# EAGLE board WiderBreadBoard (EAGLE 7.3.0), part 1 of 2
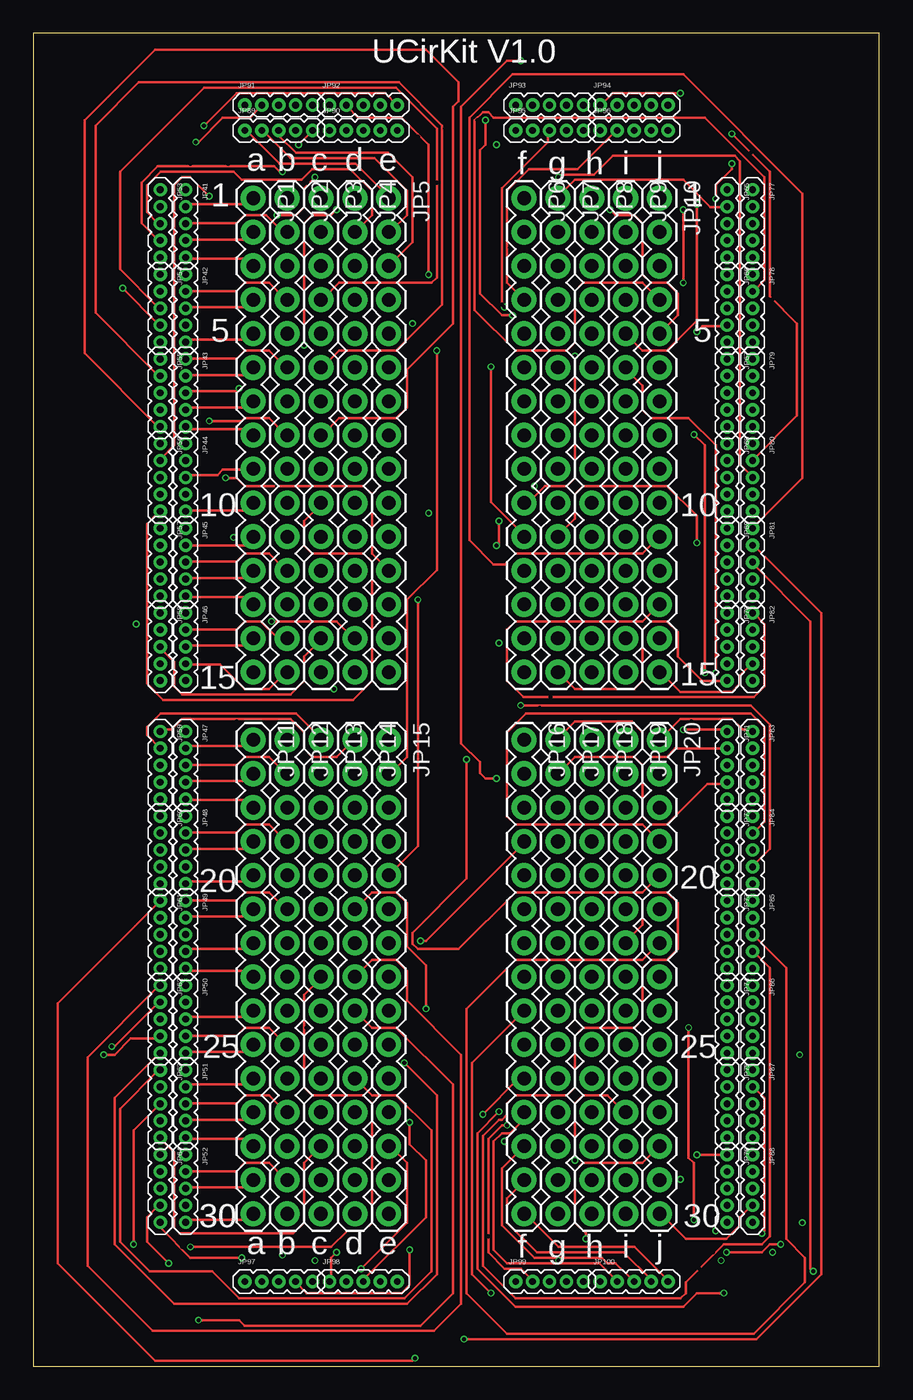
[diagram p0: board, top side]
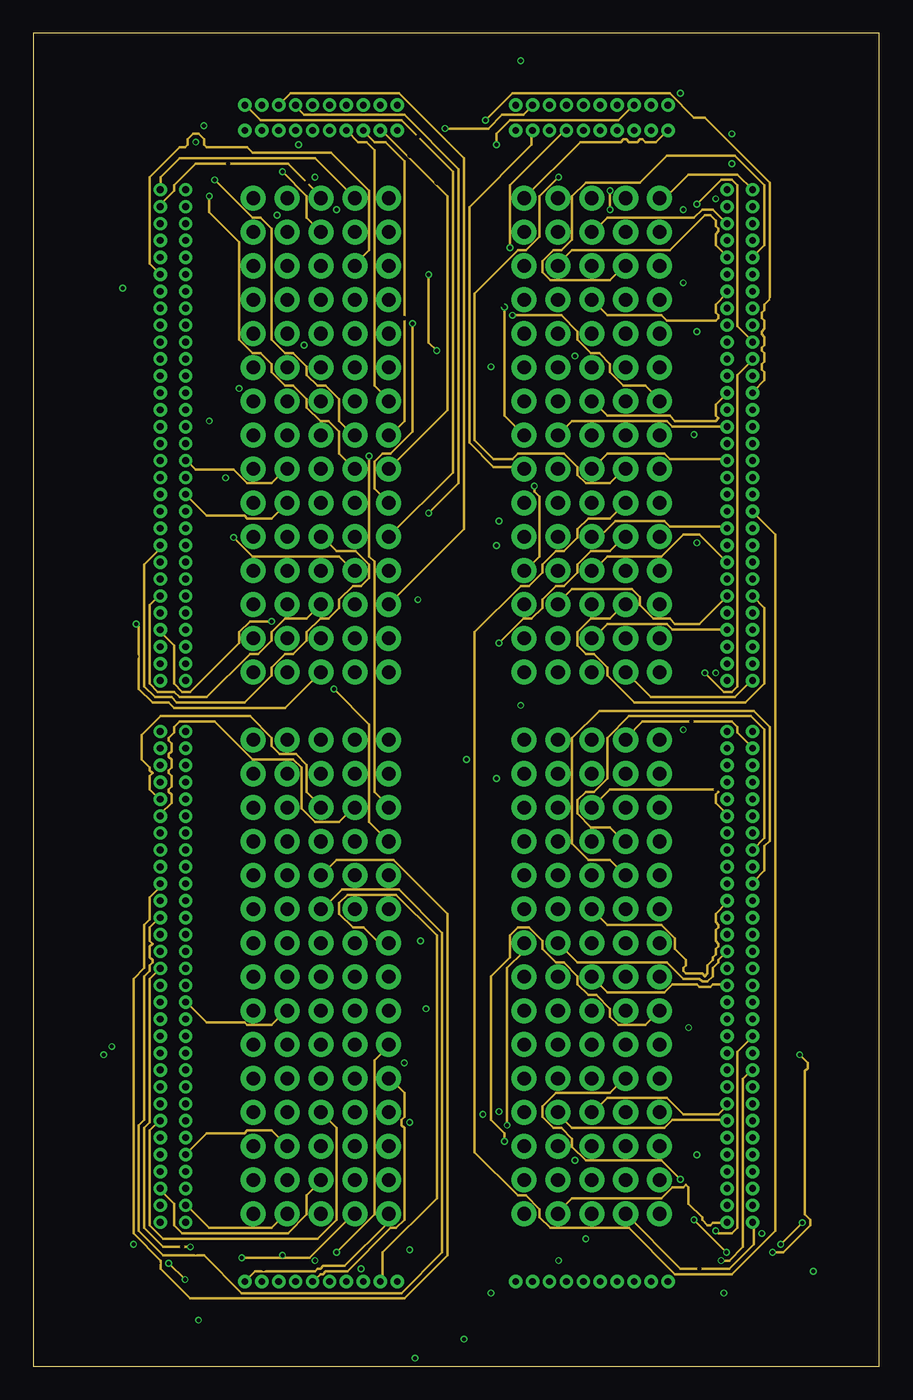
[diagram p1: board, inner layer Route2]
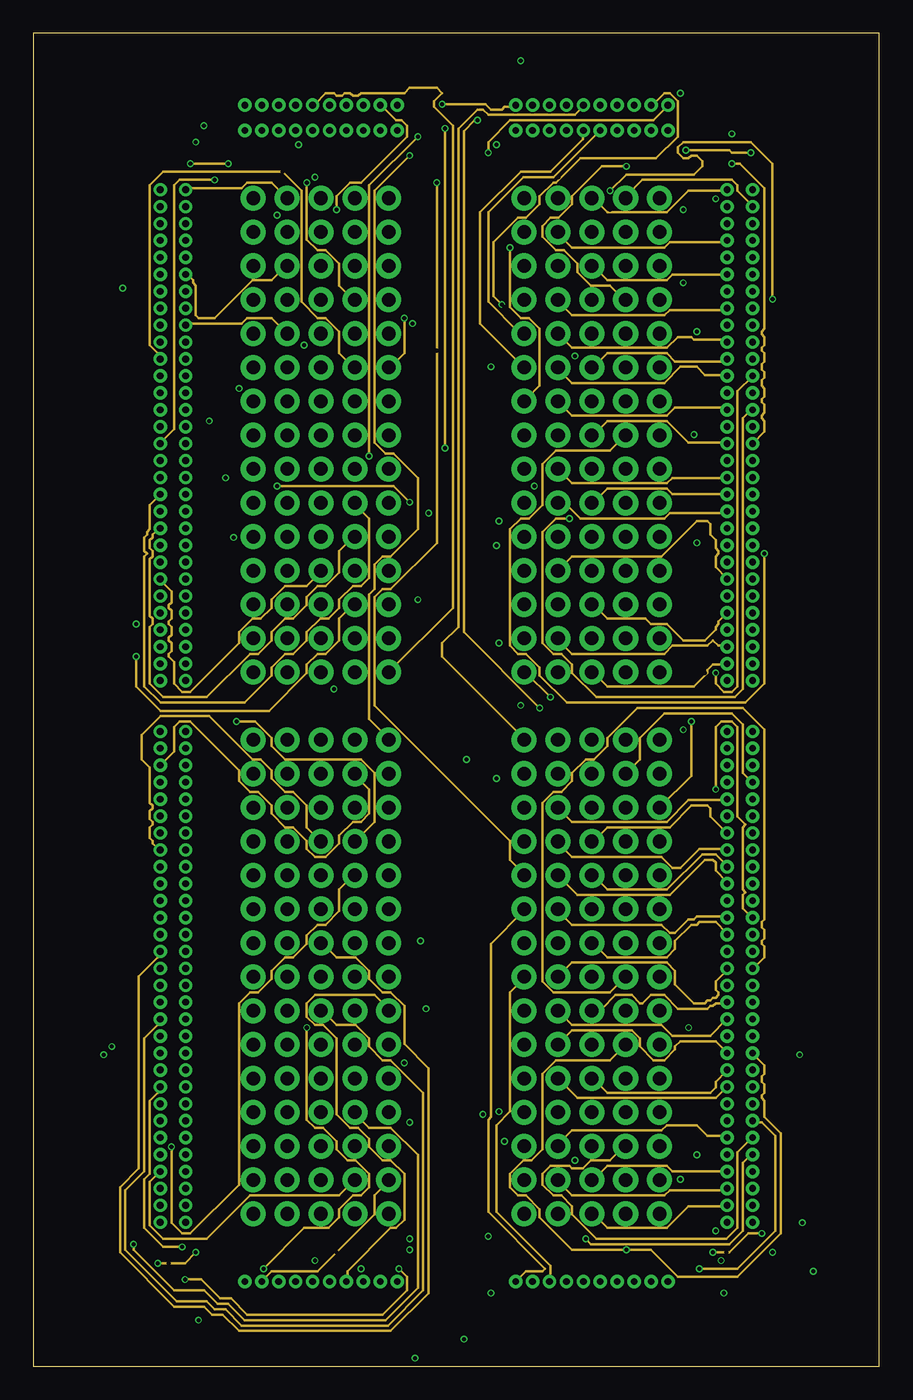
[diagram p2: board, inner layer Route15]
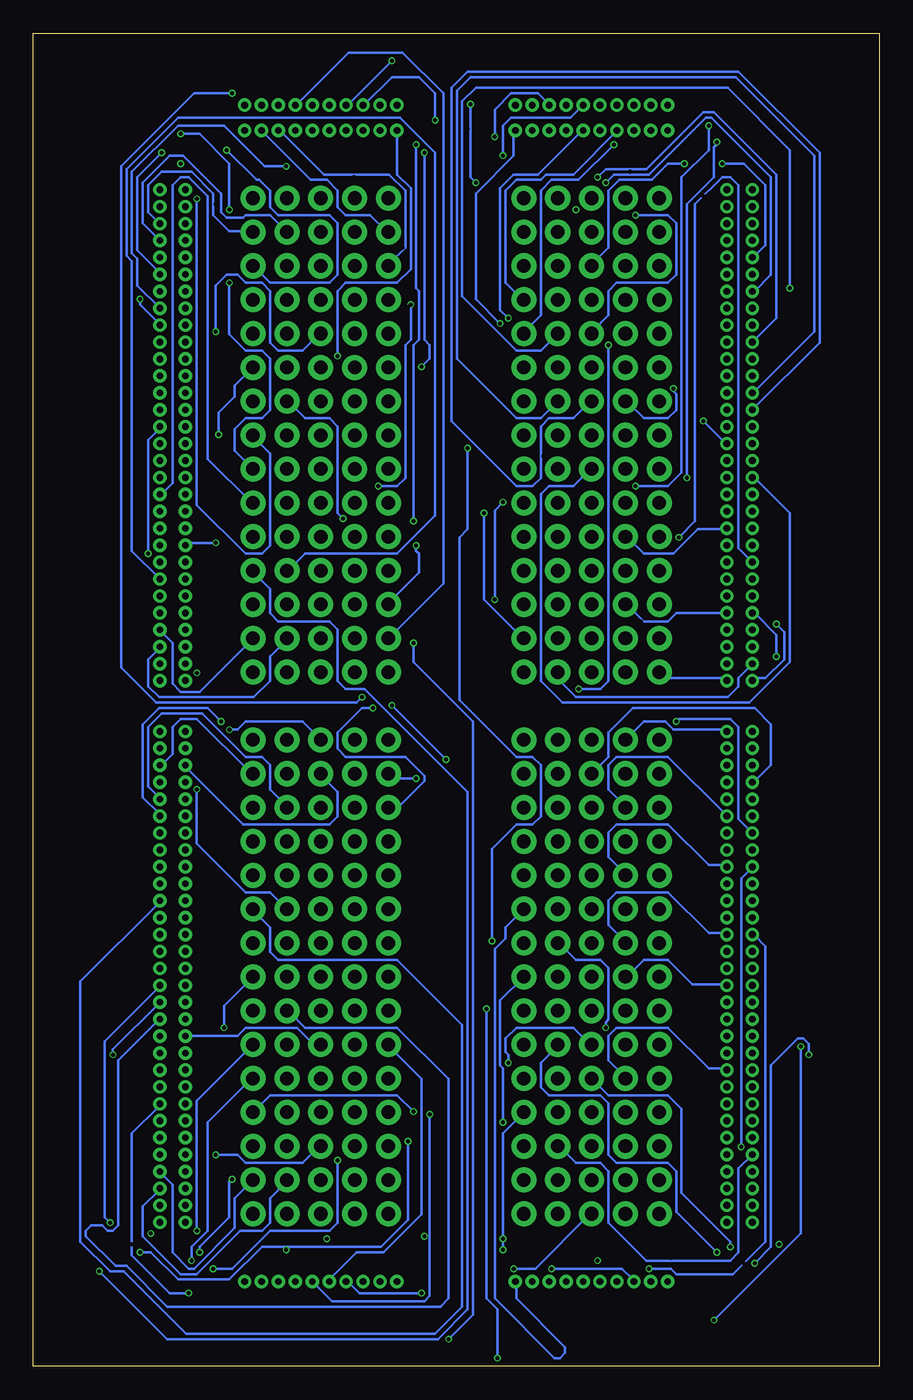
[diagram p3: board, bottom side, seen from below]

Size 63.48 x 100 mm. Coordinates in mm from the lower left corner, seen from the top.
Outline: 0,0 63.48,0 63.48,100 0,100 0,0
Copper layers [2:(1*(2*15)*16):15]: Top 0.035mm / dielectric 10mil / Route2 0.0175mm / dielectric 1mm / Route15 0.0175mm / dielectric 10mil / Bottom 0.035mm
Design rules "SeeedStudio_4layer_DRU_no_angle_20140221 *": minimum track width 8mil, minimum drill 12mil, track to track 8mil, track to pad 8mil, pad to pad 8mil, via to via 8mil, smd to smd 0mil, copper to edge 10mil, drill to drill 8mil, minimum pad ring 6mil, minimum via ring 4mil, stop-mask expansion 4mil, vias tented up to drill 100mil, thermal gap 10mil

## Footprints (pad centres in the part's own frame; a part is rotated, then mirrored left to right if it is on the bottom)
1X15 = drill 1.016 pad 1.88: 1 0,0; 2 2.54,0; 3 5.08,0; 4 7.62,0; 5 10.16,0; 6 12.7,0; 7 15.24,0; 8 17.78,0; 9 20.32,0; 10 22.86,0; 11 25.4,0; 12 27.94,0; 13 30.48,0; 14 33.02,0; 15 35.56,0
1X05-1.27MM = drill 0.508 pad 1: 1 0,0; 2 1.27,0; 3 2.54,0; 4 3.81,0; 5 5.08,0

## Placement (x,y rotation side)
JP1  [1X15]  16.51,87.63 270 top
JP2  [1X15]  19.05,87.63 270 top
JP3  [1X15]  21.59,87.63 270 top
JP4  [1X15]  24.13,87.63 270 top
JP5  [1X15]  26.67,87.63 270 top
JP6  [1X15]  36.83,87.63 270 top
JP7  [1X15]  39.37,87.63 270 top
JP8  [1X15]  41.91,87.63 270 top
JP9  [1X15]  44.45,87.63 270 top
JP10  [1X15]  46.99,87.63 270 top
JP11  [1X15]  16.51,46.99 270 top
JP12  [1X15]  19.05,46.99 270 top
JP13  [1X15]  21.59,46.99 270 top
JP14  [1X15]  24.13,46.99 270 top
JP15  [1X15]  26.67,46.99 270 top
JP16  [1X15]  36.83,46.99 270 top
JP17  [1X15]  39.37,46.99 270 top
JP18  [1X15]  41.91,46.99 270 top
JP19  [1X15]  44.45,46.99 270 top
JP20  [1X15]  46.99,46.99 270 top
JP41  [1X05-1.27MM]  11.43,88.27 270 top
JP42  [1X05-1.27MM]  11.43,81.92 270 top
JP43  [1X05-1.27MM]  11.43,75.56 270 top
JP44  [1X05-1.27MM]  11.43,69.22 270 top
JP45  [1X05-1.27MM]  11.43,62.87 270 top
JP46  [1X05-1.27MM]  11.43,56.52 270 top
JP47  [1X05-1.27MM]  11.43,47.62 270 top
JP48  [1X05-1.27MM]  11.43,41.27 270 top
JP49  [1X05-1.27MM]  11.43,34.92 270 top
JP50  [1X05-1.27MM]  11.43,28.57 270 top
JP51  [1X05-1.27MM]  11.43,22.23 270 top
JP52  [1X05-1.27MM]  11.43,15.88 270 top
JP53  [1X05-1.27MM]  9.53,88.27 270 top
JP54  [1X05-1.27MM]  9.53,81.92 270 top
JP55  [1X05-1.27MM]  9.53,75.56 270 top
JP56  [1X05-1.27MM]  9.53,69.22 270 top
JP57  [1X05-1.27MM]  9.53,62.87 270 top
JP58  [1X05-1.27MM]  9.53,56.52 270 top
JP59  [1X05-1.27MM]  9.53,47.62 270 top
JP60  [1X05-1.27MM]  9.53,41.27 270 top
JP61  [1X05-1.27MM]  9.53,34.92 270 top
JP62  [1X05-1.27MM]  9.53,28.57 270 top
JP63  [1X05-1.27MM]  9.53,22.23 270 top
JP64  [1X05-1.27MM]  9.53,15.88 270 top
JP65  [1X05-1.27MM]  52.07,88.27 270 top
JP66  [1X05-1.27MM]  52.07,81.92 270 top
JP67  [1X05-1.27MM]  52.07,75.56 270 top
JP68  [1X05-1.27MM]  52.07,69.22 270 top
JP69  [1X05-1.27MM]  52.07,62.87 270 top
JP70  [1X05-1.27MM]  52.07,56.52 270 top
JP71  [1X05-1.27MM]  52.07,47.62 270 top
JP72  [1X05-1.27MM]  52.07,41.27 270 top
JP73  [1X05-1.27MM]  52.07,34.92 270 top
JP74  [1X05-1.27MM]  52.07,28.57 270 top
JP75  [1X05-1.27MM]  52.07,22.23 270 top
JP76  [1X05-1.27MM]  52.07,15.88 270 top
JP77  [1X05-1.27MM]  53.98,88.27 270 top
JP78  [1X05-1.27MM]  53.98,81.92 270 top
JP79  [1X05-1.27MM]  53.98,75.56 270 top
JP80  [1X05-1.27MM]  53.98,69.22 270 top
JP81  [1X05-1.27MM]  53.98,62.87 270 top
JP82  [1X05-1.27MM]  53.98,56.52 270 top
JP83  [1X05-1.27MM]  53.98,47.62 270 top
JP84  [1X05-1.27MM]  53.98,41.27 270 top
JP85  [1X05-1.27MM]  53.98,34.92 270 top
JP86  [1X05-1.27MM]  53.98,28.57 270 top
JP87  [1X05-1.27MM]  53.98,22.23 270 top
JP88  [1X05-1.27MM]  53.98,15.88 270 top
JP89  [1X05-1.27MM]  15.88,92.71 0 top
JP90  [1X05-1.27MM]  22.23,92.71 0 top
JP91  [1X05-1.27MM]  15.88,94.61 0 top
JP92  [1X05-1.27MM]  22.23,94.61 0 top
JP93  [1X05-1.27MM]  36.2,94.61 0 top
JP94  [1X05-1.27MM]  42.55,94.61 0 top
JP95  [1X05-1.27MM]  36.2,92.71 0 top
JP96  [1X05-1.27MM]  42.55,92.71 0 top
JP97  [1X05-1.27MM]  15.88,6.35 0 top
JP98  [1X05-1.27MM]  22.23,6.35 0 top
JP99  [1X05-1.27MM]  36.2,6.35 0 top
JP100  [1X05-1.27MM]  42.55,6.35 0 top

## Library data of the parts
JP1-JP20 JP41-JP100 = SparkFun-Connectors

## Nets
NEW_0: JP7.3 JP65.5
NEW_1: JP7.2 JP65.4
NEW_2: JP8.2 JP65.3
NEW_3: JP7.1 JP65.2
NEW_4: JP8.1 JP65.1
NEW_5: JP7.5 JP66.5
NEW_6: JP8.5 JP66.4
NEW_7: JP7.4 JP66.3
NEW_8: JP8.4 JP66.2
NEW_9: JP8.3 JP66.1
NEW_10: JP7.8 JP67.5
NEW_11: JP7.7 JP67.4
NEW_12: JP8.7 JP67.3
NEW_13: JP7.6 JP67.2
NEW_14: JP8.6 JP67.1
NEW_15: JP7.10 JP68.5
NEW_16: JP8.10 JP68.4
NEW_17: JP7.9 JP68.3
NEW_18: JP8.9 JP68.2
NEW_19: JP8.8 JP68.1
NEW_20: JP7.13 JP69.5
NEW_21: JP7.12 JP69.4
NEW_22: JP8.12 JP69.3
NEW_23: JP7.11 JP69.2
NEW_24: JP8.11 JP69.1
NEW_25: JP7.15 JP70.5
NEW_26: JP8.15 JP70.4
NEW_27: JP7.14 JP70.3
NEW_28: JP8.14 JP70.2
NEW_29: JP8.13 JP70.1
NEW_30: JP17.3 JP71.5
NEW_31: JP17.2 JP71.4
NEW_32: JP18.2 JP71.3
NEW_33: JP17.1 JP71.2
NEW_34: JP18.1 JP71.1
NEW_35: JP17.5 JP72.5
NEW_36: JP18.5 JP72.4
NEW_37: JP17.4 JP72.3
NEW_38: JP18.4 JP72.2
NEW_39: JP18.3 JP72.1
NEW_40: JP17.8 JP73.5
NEW_41: JP17.7 JP73.4
NEW_42: JP18.7 JP73.3
NEW_43: JP17.6 JP73.2
NEW_44: JP18.6 JP73.1
NEW_45: JP17.10 JP74.5
NEW_46: JP18.10 JP74.4
NEW_47: JP17.9 JP74.3
NEW_48: JP18.9 JP74.2
NEW_49: JP18.8 JP74.1
NEW_50: JP17.13 JP75.5
NEW_51: JP17.12 JP75.4
NEW_52: JP18.12 JP75.3
NEW_53: JP17.11 JP75.2
NEW_54: JP18.11 JP75.1
NEW_55: JP17.15 JP76.5
NEW_56: JP18.15 JP76.4
NEW_57: JP17.14 JP76.3
NEW_58: JP18.14 JP76.2
NEW_59: JP18.13 JP76.1
NEW_60: JP9.3 JP77.5
NEW_61: JP9.2 JP77.4
NEW_62: JP10.2 JP77.3
NEW_63: JP9.1 JP77.2
NEW_64: JP10.1 JP77.1
NEW_65: JP9.5 JP78.5
NEW_66: JP10.5 JP78.4
NEW_67: JP9.4 JP78.3
NEW_68: JP10.4 JP78.2
NEW_69: JP10.3 JP78.1
NEW_70: JP9.8 JP79.5
NEW_71: JP9.7 JP79.4
NEW_72: JP10.7 JP79.3
NEW_73: JP9.6 JP79.2
NEW_74: JP10.6 JP79.1
NEW_75: JP9.10 JP80.5
NEW_76: JP10.10 JP80.4
NEW_77: JP9.9 JP80.3
NEW_78: JP10.9 JP80.2
NEW_79: JP10.8 JP80.1
NEW_80: JP9.13 JP81.5
NEW_81: JP9.12 JP81.4
NEW_82: JP10.12 JP81.3
NEW_83: JP9.11 JP81.2
NEW_84: JP10.11 JP81.1
NEW_85: JP9.15 JP82.5
NEW_86: JP10.15 JP82.4
NEW_87: JP9.14 JP82.3
NEW_88: JP10.14 JP82.2
NEW_89: JP10.13 JP82.1
NEW_90: JP19.3 JP83.5
NEW_91: JP19.2 JP83.4
NEW_92: JP20.2 JP83.3
NEW_93: JP19.1 JP83.2
NEW_94: JP20.1 JP83.1
NEW_95: JP19.5 JP84.5
NEW_96: JP20.5 JP84.4
NEW_97: JP19.4 JP84.3
NEW_98: JP20.4 JP84.2
NEW_99: JP20.3 JP84.1
NEW_100: JP19.8 JP85.5
NEW_101: JP19.7 JP85.4
NEW_102: JP20.7 JP85.3
NEW_103: JP19.6 JP85.2
NEW_104: JP20.6 JP85.1
NEW_105: JP19.10 JP86.5
NEW_106: JP20.10 JP86.4
NEW_107: JP19.9 JP86.3
NEW_108: JP20.9 JP86.2
NEW_109: JP20.8 JP86.1
NEW_110: JP19.13 JP87.5
NEW_111: JP19.12 JP87.4
NEW_112: JP20.12 JP87.3
NEW_113: JP19.11 JP87.2
NEW_114: JP20.11 JP87.1
NEW_115: JP19.15 JP88.5
NEW_116: JP20.15 JP88.4
NEW_117: JP19.14 JP88.3
NEW_118: JP20.14 JP88.2
NEW_119: JP20.13 JP88.1
NEW_120: JP1.3 JP41.5
NEW_121: JP1.2 JP41.4
NEW_122: JP2.2 JP41.3
NEW_123: JP1.1 JP41.2
NEW_124: JP2.1 JP41.1
NEW_125: JP1.5 JP42.5
NEW_126: JP2.5 JP42.4
NEW_127: JP1.4 JP42.3
NEW_128: JP2.4 JP42.2
NEW_129: JP2.3 JP42.1
NEW_130: JP1.8 JP43.5
NEW_131: JP1.7 JP43.4
NEW_132: JP2.7 JP43.3
NEW_133: JP1.6 JP43.2
NEW_134: JP2.6 JP43.1
NEW_135: JP1.10 JP44.5
NEW_136: JP2.10 JP44.4
NEW_137: JP1.9 JP44.3
NEW_138: JP2.9 JP44.2
NEW_139: JP2.8 JP44.1
NEW_140: JP1.13 JP45.5
NEW_141: JP1.12 JP45.4
NEW_142: JP2.12 JP45.3
NEW_143: JP1.11 JP45.2
NEW_144: JP2.11 JP45.1
NEW_145: JP1.15 JP46.5
NEW_146: JP2.15 JP46.4
NEW_147: JP1.14 JP46.3
NEW_148: JP2.14 JP46.2
NEW_149: JP2.13 JP46.1
NEW_150: JP11.3 JP47.5
NEW_151: JP11.2 JP47.4
NEW_152: JP12.2 JP47.3
NEW_153: JP11.1 JP47.2
NEW_154: JP12.1 JP47.1
NEW_155: JP11.5 JP48.5
NEW_156: JP12.5 JP48.4
NEW_157: JP11.4 JP48.3
NEW_158: JP12.4 JP48.2
NEW_159: JP12.3 JP48.1
NEW_160: JP11.8 JP49.5
NEW_161: JP11.7 JP49.4
NEW_162: JP12.7 JP49.3
NEW_163: JP11.6 JP49.2
NEW_164: JP12.6 JP49.1
NEW_165: JP11.10 JP50.5
NEW_166: JP12.10 JP50.4
NEW_167: JP11.9 JP50.3
NEW_168: JP12.9 JP50.2
NEW_169: JP12.8 JP50.1
NEW_170: JP11.13 JP51.5
NEW_171: JP11.12 JP51.4
NEW_172: JP12.12 JP51.3
NEW_173: JP11.11 JP51.2
NEW_174: JP12.11 JP51.1
NEW_175: JP11.15 JP52.5
NEW_176: JP12.15 JP52.4
NEW_177: JP11.14 JP52.3
NEW_178: JP12.14 JP52.2
NEW_179: JP12.13 JP52.1
NEW_180: JP3.3 JP53.5
NEW_181: JP3.2 JP53.4
NEW_182: JP4.2 JP53.3
NEW_183: JP3.1 JP53.2
NEW_184: JP4.1 JP53.1
NEW_185: JP3.5 JP54.5
NEW_186: JP4.5 JP54.4
NEW_187: JP3.4 JP54.3
NEW_188: JP4.4 JP54.2
NEW_189: JP4.3 JP54.1
NEW_190: JP3.8 JP55.5
NEW_191: JP3.7 JP55.4
NEW_192: JP4.7 JP55.3
NEW_193: JP3.6 JP55.2
NEW_194: JP4.6 JP55.1
NEW_195: JP3.10 JP56.5
NEW_196: JP4.10 JP56.4
NEW_197: JP3.9 JP56.3
NEW_198: JP4.9 JP56.2
NEW_199: JP4.8 JP56.1
NEW_200: JP3.13 JP57.5
NEW_201: JP3.12 JP57.4
NEW_202: JP4.12 JP57.3
NEW_203: JP3.11 JP57.2
NEW_204: JP4.11 JP57.1
NEW_205: JP3.15 JP58.5
NEW_206: JP4.15 JP58.4
NEW_207: JP3.14 JP58.3
NEW_208: JP4.14 JP58.2
NEW_209: JP4.13 JP58.1
NEW_210: JP13.3 JP59.5
NEW_211: JP13.2 JP59.4
NEW_212: JP14.2 JP59.3
NEW_213: JP13.1 JP59.2
NEW_214: JP14.1 JP59.1
NEW_215: JP13.5 JP60.5
NEW_216: JP14.5 JP60.4
NEW_217: JP13.4 JP60.3
NEW_218: JP14.4 JP60.2
NEW_219: JP14.3 JP60.1
NEW_220: JP13.8 JP61.5
NEW_221: JP13.7 JP61.4
NEW_222: JP14.7 JP61.3
NEW_223: JP13.6 JP61.2
NEW_224: JP14.6 JP61.1
NEW_225: JP13.10 JP62.5
NEW_226: JP14.10 JP62.4
NEW_227: JP13.9 JP62.3
NEW_228: JP14.9 JP62.2
NEW_229: JP14.8 JP62.1
NEW_230: JP13.13 JP63.5
NEW_231: JP13.12 JP63.4
NEW_232: JP14.12 JP63.3
NEW_233: JP13.11 JP63.2
NEW_234: JP14.11 JP63.1
NEW_235: JP14.15 JP64.5
NEW_236: JP13.14 JP64.3
NEW_237: JP14.14 JP64.2
NEW_238: JP14.13 JP64.1
NEW_239: JP5.5 JP89.5
NEW_240: JP5.4 JP89.4
NEW_241: JP5.3 JP89.3
NEW_242: JP5.2 JP89.2
NEW_243: JP5.1 JP89.1
NEW_244: JP5.10 JP90.5
NEW_245: JP5.9 JP90.4
NEW_246: JP5.8 JP90.3
NEW_247: JP5.7 JP90.2
NEW_248: JP5.6 JP90.1
NEW_249: JP5.15 JP91.5
NEW_250: JP5.14 JP91.4
NEW_251: JP5.13 JP91.3
NEW_252: JP5.12 JP91.2
NEW_253: JP5.11 JP91.1
NEW_254: JP15.5 JP92.5
NEW_255: JP15.4 JP92.4
NEW_256: JP15.3 JP92.3
NEW_257: JP15.2 JP92.2
NEW_258: JP15.1 JP92.1
NEW_259: JP15.11 JP97.5
NEW_260: JP15.12 JP97.4
NEW_261: JP15.13 JP97.3
NEW_262: JP15.14 JP97.2
NEW_263: JP15.15 JP97.1
NEW_264: JP15.6 JP98.5
NEW_265: JP15.7 JP98.4
NEW_266: JP15.8 JP98.3
NEW_267: JP15.9 JP98.2
NEW_268: JP15.10 JP98.1
NEW_269: JP16.1 JP93.5
NEW_270: JP16.2 JP93.4
NEW_271: JP16.3 JP93.3
NEW_272: JP16.4 JP93.2
NEW_273: JP16.5 JP93.1
NEW_274: JP6.11 JP94.5
NEW_275: JP6.12 JP94.4
NEW_276: JP6.13 JP94.3
NEW_277: JP6.14 JP94.2
NEW_278: JP6.15 JP94.1
NEW_279: JP6.6 JP95.5
NEW_280: JP6.7 JP95.4
NEW_281: JP6.8 JP95.3
NEW_282: JP6.9 JP95.2
NEW_283: JP6.10 JP95.1
NEW_284: JP6.1 JP96.5
NEW_285: JP6.2 JP96.4
NEW_286: JP6.3 JP96.3
NEW_287: JP6.4 JP96.2
NEW_288: JP6.5 JP96.1
NEW_289: JP16.10 JP99.5
NEW_290: JP16.9 JP99.4
NEW_291: JP16.8 JP99.3
NEW_292: JP16.7 JP99.2
NEW_293: JP16.6 JP99.1
NEW_294: JP16.15 JP100.5
NEW_295: JP16.14 JP100.4
NEW_296: JP16.13 JP100.3
NEW_297: JP16.12 JP100.2
NEW_298: JP16.11 JP100.1
NEW_300: JP13.15 JP64.4

## Tracks (layer width: path | path; a pad name or v marks a point on that pad's centre or on a via)
NEW_0
  Route2 0.203: JP65.5 52.02,83.31 51.21,84.12 51.21,84.94 51.41,85.14 51.41,85.34 51.21,85.55 51.21,85.95 50.8,86.36 50.39,86.36 47.75,83.72 40.44,83.72 39.42,82.7 JP7.3
NEW_1
  Route15 0.203: JP65.4 52.02,84.33 47.75,84.33 47.35,83.92 40.44,83.92 39.42,84.94 JP7.2
NEW_2
  Route2 0.203: JP65.3 52.02,85.75 51,86.77 50.19,86.77 49.58,86.16 43.08,86.16 42.06,85.14 JP8.2
NEW_3
  Top 0.203: JP65.2 52.02,86.97 50.8,86.97 48.77,89 40.64,89 39.42,87.78 JP7.1
NEW_4
  Route15 0.203: JP65.1 52.02,88.19 49.17,88.19 47.55,86.56 43.08,86.56 42.06,87.58 JP8.1
NEW_5
  Route15 0.203: JP7.5 40.44,76.4 47.55,76.4 48.36,77.22 49.38,77.22 49.58,77.01 52.02,77.01 JP66.5
NEW_6  (via drill 0.3)
  Top 0.203: v49.78,77.62 50.19,78.03 52.02,78.03 JP66.4
  Bottom 0.203: v49.78,77.62 49.78,81.08 48.97,81.89 48.16,81.89 47.55,81.28 46.33,81.28 45.72,80.67 45.72,76.81 45.11,76.2 43.28,76.2 42.06,77.42 JP8.5
NEW_7
  Route15 0.203: JP66.3 52.02,79.25 47.75,79.25 47.35,78.84 40.44,78.84 39.42,79.86 JP7.4
NEW_8
  Route2 0.203: JP8.4 43.08,78.84 47.14,78.84 47.55,78.44 51.21,78.44 51.41,78.64 51.41,78.84 51.21,79.05 51.21,79.65 52.02,80.47 JP66.2
NEW_9
  Route15 0.203: JP66.1 52.02,81.89 47.95,81.89 47.55,81.48 43.08,81.48 42.06,82.5 JP8.3
NEW_10
  Route2 0.203: JP7.8 40.44,70.92 47.55,70.92 47.95,70.51 52.02,70.51 JP67.5
NEW_11
  Route15 0.203: JP7.7 40.44,71.32 47.55,71.32 48.16,71.93 52.02,71.93 JP67.4
NEW_12
  Route2 0.203: JP67.3 52.02,72.95 51.21,72.14 51.21,71.32 51.41,71.12 51.21,70.92 48.16,70.92 47.75,71.32 43.08,71.32 42.06,72.34 JP8.7
NEW_13
  Route15 0.203: JP67.2 52.02,74.37 50.39,74.37 49.78,74.98 48.56,74.98 47.35,73.76 40.44,73.76 39.42,74.78 JP7.6
NEW_14
  Route15 0.203: JP67.1 52.02,75.39 48.16,75.39 47.55,76 43.08,76 42.06,74.98 JP8.6
NEW_15
  Route15 0.203: JP68.5 52.02,64.01 47.75,64.01 47.35,63.6 41.05,63.6 40.03,64.62 39.42,64.62 JP7.10
NEW_16
  Route15 0.203: JP68.4 52.02,65.43 47.95,65.43 47.55,65.84 43.08,65.84 42.06,64.82 JP8.10
NEW_17
  Route15 0.203: JP7.9 40.44,66.24 47.55,66.24 47.95,66.65 52.02,66.65 JP68.3
NEW_18
  Route2 0.203: JP8.9 43.08,68.48 47.35,68.48 47.75,68.07 52.02,68.07 JP68.2
NEW_19
  Route15 0.203: JP68.1 52.02,69.29 49.17,69.29 47.55,70.92 43.08,70.92 42.06,69.9 JP8.8
NEW_20
  Route2 0.203: JP69.5 52.02,57.71 49.99,55.68 48.16,55.68 47.75,56.08 46.53,56.08 45.52,57.1 45.52,57.71 44.91,58.32 40.44,58.32 39.42,57.3 JP7.13
NEW_21
  Route15 0.203: JP7.12 40.44,60.76 47.14,60.76 49.78,63.4 50.6,63.4 50.8,63.2 50.8,62.38 51.21,61.98 51.21,61.37 51.41,61.16 51.41,60.96 51.21,60.76 51.21,59.94 52.02,59.13 JP69.4
NEW_22
  Route2 0.203: JP69.3 52.02,60.35 49.99,62.38 48.77,62.38 47.14,60.76 43.08,60.76 42.06,59.74 JP8.12
NEW_23  (via drill 0.3)
  Top 0.203: v49.78,61.77 49.78,63.8 47.55,66.04 41.25,66.04 40.64,65.43 40.64,63.6 39.42,62.38 JP7.11
  Bottom 0.203: v49.78,61.77 52.02,61.77 JP69.2
NEW_24
  Route2 0.203: JP69.1 52.02,62.99 47.75,62.99 47.35,63.4 43.69,63.4 42.67,62.38 42.06,62.38 JP8.11
NEW_25
  Top 0.203: JP7.15 40.64,50.8 45.11,50.8 45.72,51.41 45.72,55.27 46.33,55.88 47.55,55.88 48.36,55.07 48.36,53.24 50.19,51.41 52.02,51.41 JP70.5
NEW_26
  Route15 0.203: JP70.4 52.02,52.63 51,52.63 50.6,52.22 50.6,52.02 49.58,51 43.08,51 42.06,52.02 JP8.15
NEW_27
  Route15 0.203: JP70.3 52.02,54.05 51.41,54.05 51,54.46 50.6,54.05 47.95,54.05 47.35,53.44 40.44,53.44 39.42,54.46 JP7.14
NEW_28
  Route2 0.203: JP70.2 52.02,55.27 47.95,55.27 47.55,55.68 43.08,55.68 42.06,54.66 JP8.14
NEW_29
  Route15 0.203: JP70.1 52.02,56.49 51.41,55.88 51.41,55.68 51.21,55.47 51.21,55.27 50.39,54.46 48.77,54.46 47.55,55.68 46.33,55.68 45.92,56.08 43.08,56.08 42.06,57.1 JP8.13
NEW_30
  Route15 0.203: JP17.3 40.44,40.84 47.55,40.84 49.17,42.47 52.02,42.47 JP71.5
NEW_31
  Top 0.203: JP17.2 40.64,45.72 45.11,45.72 45.72,45.11 45.72,41.25 46.33,40.64 47.55,40.64 50.6,43.69 52.02,43.69 JP71.4
NEW_32
  Bottom 0.203: JP71.3 52.02,44.91 47.75,40.64 41.25,40.64 40.64,41.25 40.64,43.08 41.86,44.3 JP18.2
NEW_33
  Top 0.203: JP71.2 52.02,46.33 48.16,46.33 47.55,45.72 46.33,45.72 45.72,46.33 45.72,47.55 44.91,48.36 40.64,48.36 39.42,47.14 JP17.1
NEW_34  (via drill 0.3)
  Top 0.203: v48.77,47.75 52.02,47.75 JP71.1
  Bottom 0.203: v48.77,47.75 48.16,47.75 47.55,48.36 43.28,48.36 JP18.1
NEW_35
  Route15 0.203: JP17.5 40.84,35.36 47.75,35.36 50.39,38 51,38 51.21,37.8 51.21,37.19 52.02,36.37 JP72.5
NEW_36
  Route15 0.203: JP72.4 52.02,37.59 51.21,38.41 50.19,38.41 47.55,35.76 43.08,35.76 42.06,36.78 JP18.5
NEW_37
  Route15 0.203: JP72.3 52.02,38.81 49.99,38.81 48.56,37.39 47.95,37.39 47.14,38.2 40.44,38.2 39.42,39.22 JP17.4
NEW_38
  Route15 0.203: JP72.2 52.02,40.03 50.8,41.25 50.8,41.86 50.6,42.06 49.38,42.06 47.75,40.44 43.08,40.44 42.06,39.42 JP18.4
NEW_39
  Route2 0.203: JP18.3 43.28,43.28 51.21,43.28 51.41,43.08 51.21,42.88 51.21,42.27 52.02,41.45 JP72.1
NEW_40
  Route15 0.203: JP17.8 40.44,30.28 47.55,30.28 48.16,29.67 48.16,28.65 49.58,27.23 50.39,27.23 50.6,27.43 50.8,27.43 51,27.64 51.21,27.64 51.41,27.84 51.41,28.04 51.21,28.25 51.21,28.85 52.02,29.67 JP73.5
NEW_41
  Route2 0.203: JP17.7 40.84,30.28 47.55,30.28 48.77,29.06 49.99,29.06 50.19,28.85 50.6,28.85 51,29.26 51,29.87 51.41,30.28 51.41,30.48 52.02,31.09 JP73.4
NEW_42
  Route15 0.203: JP73.3 52.02,32.51 51.21,33.33 49.99,33.33 49.78,33.12 49.38,33.12 48.16,31.9 48.16,31.29 47.55,30.68 43.08,30.68 42.06,31.7 JP18.7
NEW_43
  Route15 0.203: JP73.2 52.02,33.73 49.78,33.73 49.58,33.53 49.17,33.53 48.16,32.51 47.75,32.51 47.14,33.12 40.44,33.12 39.42,34.14 JP17.6
NEW_44
  Route2 0.203: JP18.6 43.08,33.12 47.14,33.12 48.16,32.11 48.16,31.29 48.97,30.48 48.97,30.07 48.77,29.87 48.77,29.67 48.97,29.46 50.19,29.46 50.39,29.26 50.6,29.46 50.6,30.07 51,30.48 51,30.68 51.21,30.89 51.21,31.29 51.41,31.5 51.41,31.7 51.21,31.9 51.21,32.72 51.41,32.92 51.41,33.12 51.21,33.33 51.21,33.93 52.02,34.75 JP73.1
NEW_45
  Route15 0.203: JP17.10 40.44,25.2 44.91,25.2 45.52,24.59 45.52,23.98 46.53,22.96 47.35,22.96 48.16,23.77 48.16,23.98 48.56,24.38 51.21,24.38 52.02,23.57 JP74.5
NEW_46
  Bottom 0.203: JP74.4 52.02,24.79 48.16,24.79 47.55,25.4 43.69,25.4 42.47,24.18 42.06,24.18 JP18.10
NEW_47
  Route15 0.203: JP17.9 40.44,25.6 47.14,25.6 47.95,24.79 50.8,24.79 52.02,26.01 JP74.3
NEW_48
  Route15 0.203: JP74.2 52.02,27.23 51.21,27.23 51,27.03 50.8,27.03 50.6,26.82 48.36,26.82 47.35,27.84 46.33,27.84 45.72,27.23 45.52,27.23 44.91,27.84 43.69,27.84 42.67,26.82 42.06,26.82 JP18.9
NEW_49
  Route2 0.203: JP18.8 43.08,28.04 47.35,28.04 47.95,28.65 49.78,28.65 49.99,28.45 50.8,28.45 51,28.65 52.02,28.65 JP74.1
NEW_50
  Route15 0.203: JP75.5 52.02,17.27 50.6,17.27 49.78,18.09 47.55,18.09 47.14,17.68 40.44,17.68 39.42,16.66 JP17.13
NEW_51
  Route2 0.203: JP75.4 52.02,18.49 47.95,18.49 47.35,17.88 40.44,17.88 39.42,18.9 JP17.12
NEW_52
  Route2 0.203: JP75.3 52.02,19.51 51.41,18.9 48.77,18.9 47.55,20.12 43.08,20.12 42.06,19.1 JP18.12
NEW_53
  Route15 0.203: JP17.11 40.84,20.12 51.21,20.12 52.02,20.93 JP75.2
NEW_54
  Route15 0.203: JP75.1 52.02,22.15 51.21,21.34 51.21,20.93 50.8,20.52 43.08,20.52 42.06,21.54 JP18.11
NEW_55
  Route2 0.203: JP76.5 52.02,10.77 51,10.77 50.8,10.57 50.6,10.57 50.19,10.97 50.19,11.18 49.17,12.19 49.17,13.41 48.97,13.61 48.77,13.41 47.95,13.41 47.14,12.6 40.44,12.6 39.42,11.58 JP17.15
NEW_56
  Route15 0.203: JP76.4 52.02,11.99 49.17,11.99 47.55,10.36 43.08,10.36 42.06,11.38 JP18.15
NEW_57
  Route15 0.203: JP76.3 52.02,13.21 47.75,13.21 47.35,12.8 40.44,12.8 39.42,13.82 JP17.14
NEW_58
  Route15 0.203: JP76.2 52.02,14.63 47.95,14.63 47.55,15.04 43.08,15.04 42.06,14.02 JP18.14
NEW_59  (via drill 0.3)
  Top 0.203: v49.78,15.85 52.02,15.85 JP76.1
  Bottom 0.203: v49.78,15.85 48.16,15.85 47.55,15.24 43.28,15.24 42.06,16.46 JP18.13
NEW_60
  Route2 0.203: JP77.5 54.05,83.31 54.86,84.12 54.86,88.59 52.63,90.83 47.55,90.83 45.52,88.8 41.45,88.8 40.44,87.78 40.44,84.53 39.62,83.72 39.01,83.72 38.2,82.91 38.2,82.09 38.81,81.48 43.28,81.48 44.3,82.5 JP9.3
NEW_61
  Bottom 0.203: JP77.4 55.27,85.75 55.27,88.8 53.24,90.83 52.22,90.83 49.38,87.99 49.38,86.56 48.97,86.16 47.75,86.16 47.55,86.36 45.72,86.36 JP9.2
NEW_62
  Bottom 0.203: JP77.3 54.05,85.75 54.86,86.56 54.86,88.59 53.85,89.61 51.61,89.61 49.99,87.99 49.99,86.36 48.77,85.14 47.14,85.14 JP10.2
NEW_63
  Route15 0.203: JP77.2 53.85,87.17 52.83,88.19 52.83,88.59 52.43,89 45.72,89 44.5,87.78 JP9.1
NEW_64
  Route2 0.203: JP77.1 52.83,89.41 49.17,89.41 47.55,87.78 47.14,87.78 JP10.1
NEW_65  (via drill 0.3 layers 1-2)
  Top 0.203: v49.78,87.17 49.78,78.44 47.55,76.2 45.72,76.2 JP9.5
  Route2 0.203: v49.78,87.17 51.61,89 52.43,89 52.83,88.59 52.83,78.03 53.85,77.01 JP78.5
NEW_66  (via drill 0.3 layers 1-2, 0.3 layers 15-16, 0.3 layers 2-15)
  Top 0.203: v43.28,86.77 43.69,86.36 45.11,86.36 45.72,85.75 45.72,81.89 46.33,81.28 47.55,81.28 48.36,80.47 48.36,78.84 JP10.5
  Route2 0.203: v43.28,86.77 v43.28,88.19
  Route15 0.203: v55.47,80.06 55.47,90.22 53.85,91.85 48.77,91.85 48.36,91.44 48.36,91.03 48.77,90.63 49.17,90.63 49.38,90.83 49.78,90.83 50.19,90.42 50.19,90.02 49.58,89.41 44.5,89.41 v43.28,88.19
  Bottom 0.203: v55.47,80.06 55.47,79.65 54.05,78.23 JP78.4
NEW_67  (via drill 0.3 layers 15-16)
  Route15 0.203: v44.5,90.02 42.67,90.02 40.44,87.78 40.44,87.17 39.42,86.16 38.81,86.16 38.2,85.55 38.2,84.73 39.22,83.72 39.83,83.72 40.84,82.7 40.84,82.09 41.86,81.08 43.28,81.08 44.3,80.06 JP9.4
  Bottom 0.203: JP78.3 55.68,81.08 55.68,83.11 56.08,83.52 56.08,89.61 52.63,93.07 49.17,93.07 46.13,90.02 v44.5,90.02
NEW_68
  Top 0.203: JP10.4 45.72,81.28 41.25,81.28 40.64,80.67 40.64,76.81 40.03,76.2 36.17,76.2 33.12,79.25 33.12,93.47 33.73,94.08 34.14,94.08 34.54,93.67 50.39,93.67 54.86,89.2 54.86,81.48 54.05,80.67 JP78.2
NEW_69  (via drill 0.3 layers 15-16)
  Route15 0.203: v53.85,91.03 52.43,91.03 52.22,91.24 v48.97,91.24
  Bottom 0.203: v53.85,91.03 55.68,89.2 55.68,83.72 54.05,82.09 JP78.1 | v48.97,91.24 46.74,89 46.53,89 45.72,88.19 45.72,86.97 45.11,86.36 41.25,86.36 40.64,85.75 40.64,81.89 41.25,81.28 45.72,81.28 JP10.3
NEW_70  (via drill 0.3 layers 15-16)
  Route15 0.203: v54.86,60.96 54.86,51.21 53.44,49.78 40.03,49.78 38,51.82 38,52.43 36.98,53.44 36.37,53.44 35.76,54.05 35.76,62.79 36.58,63.6 37.19,63.6 38.2,64.62 38.2,67.67 39.22,68.68 43.28,68.68 JP9.8
  Bottom 0.203: v54.86,60.96 54.86,69.49 54.05,70.31 JP79.5
NEW_71  (via drill 0.3 layers 15-16)
  Route15 0.203: v40.23,63.6 39.22,63.6 38.2,62.59 38.2,54.25 39.01,53.44 39.62,53.44 40.44,52.63 40.44,52.02 42.27,50.19 52.63,50.19 53.24,50.8 53.24,71.12 53.85,71.73 JP79.4
  Bottom 0.203: v40.23,63.6 40.64,64.01 40.64,70.51 41.25,71.12 43.08,71.12 44.3,72.34 JP9.7
NEW_72  (via drill 0.3 layers 1-2)
  Top 0.203: v33.93,93.47 33.93,91.64 33.53,91.24 33.53,80.47 35.15,78.84 v35.97,78.84
  Route2 0.203: v33.93,93.47 35.97,95.5 47.75,95.5 49.58,93.67 50.39,93.67 55.27,88.8 55.27,80.06 54.86,79.65 54.86,79.25 54.66,79.05 54.66,78.64 54.86,78.44 54.86,77.83 54.66,77.62 54.66,77.42 54.86,77.22 54.86,76.61 54.66,76.4 54.66,76.2 54.86,76 54.86,75.39 54.66,75.18 54.66,74.78 54.86,74.57 54.86,73.97 54.05,73.15 JP79.3 | v35.97,78.84 39.62,78.84 40.84,77.62 40.84,77.01 41.86,76 42.47,76 43.28,75.18 43.28,74.57 44.3,73.56 45.92,73.56 46.94,72.54 JP10.7
NEW_73  (via drill 0.3)
  Top 0.203: v51.21,52.02 51.21,69.09 49.17,71.12 46.33,71.12 45.72,71.73 45.72,73.56 44.5,74.78 JP9.6
  Route15 0.203: JP79.2 52.83,73.15 52.83,51 52.43,50.6 51.82,50.6 51.21,51.21 v51.21,52.02
NEW_74  (via drill 0.3, 0.3 layers 1-2)
  Top 0.203: v50.39,52.02 50.39,69.09 v49.58,69.9
  Route2 0.203: v50.39,52.02 51.82,50.6 52.43,50.6 52.83,51 52.83,74.37 53.85,75.39 JP79.1
  Bottom 0.203: v49.58,69.9 49.58,71.53 48.36,72.75 48.36,73.56 JP10.6
NEW_75
  Route2 0.203: JP9.10 43.28,63.6 41.66,63.6 40.84,62.79 40.84,62.18 39.83,61.16 39.22,61.16 38.2,60.15 38.2,59.54 37.19,58.52 36.58,58.52 33.12,55.07 33.12,16.05 36.37,12.8 36.98,12.8 38,11.79 38,11.18 38.81,10.36 44.7,10.36 48.16,6.91 52.43,6.91 55.68,10.16 55.68,62.38 54.05,64.01 JP80.5
NEW_76
  Bottom 0.203: JP80.4 53.85,65.43 53.03,66.24 53.03,88.59 52.43,89.2 51.82,89.2 50.39,87.78 50.39,68.07 47.14,64.82 JP10.10
NEW_77  (via drill 0.3 layers 1-2)
  Top 0.203: v39.42,89.2 39.62,89.41 42.06,89.41 43.48,90.83 52.63,90.83 53.03,90.42 53.03,67.67 53.85,66.85 JP80.3
  Route2 0.203: v39.42,89.2 38,87.78 38,84.73 36.98,83.72 36.37,83.72 33.12,80.47 33.12,69.49 34.54,68.07 35.97,68.07 36.37,68.48 39.83,68.48 40.84,67.46 40.84,66.85 41.45,66.24 43.28,66.24 44.3,67.26 JP9.9
NEW_78  (via drill 0.3)
  Top 0.203: v52.43,92.46 55.27,89.61 55.27,80.26 57.3,78.23 57.3,71.32 54.05,68.07 JP80.2 | v48.77,81.28 v48.77,86.77
  Bottom 0.203: v52.43,92.46 51,92.46 48.77,90.22 v48.77,86.77 | v48.77,81.28 48.77,77.42 47.55,76.2 46.33,76.2 45.72,75.59 45.72,71.73 46.33,71.12 47.55,71.12 48.36,70.31 48.36,68.68 JP10.9
NEW_79  (via drill 0.3)
  Top 0.203: v52.43,90.22 52.43,89.81 51.21,88.59 v51.21,87.58
  Route15 0.203: JP80.1 54.86,70.1 54.86,70.92 54.66,71.12 54.66,71.32 54.86,71.53 54.86,72.14 54.66,72.34 54.66,72.54 54.86,72.75 54.86,73.36 54.66,73.56 54.66,73.97 54.86,74.17 54.86,74.57 54.66,74.78 54.66,75.18 54.86,75.39 54.86,76 54.66,76.2 54.66,76.4 54.86,76.61 54.86,77.22 54.66,77.42 54.66,77.62 54.86,77.83 54.86,88.39 53.03,90.22 v52.43,90.22
  Bottom 0.203: v51.21,87.58 51.21,64.62 47.55,60.96 46.33,60.96 45.72,61.57 45.72,68.48 46.94,69.7 JP10.8
NEW_80
  Route2 0.203: JP81.5 54.86,56.9 54.86,51.21 53.44,49.78 45.11,49.78 43.08,51.82 43.08,52.43 42.06,53.44 41.45,53.44 40.84,54.05 40.84,55.07 41.86,56.08 43.28,56.08 44.3,57.1 JP9.13
NEW_81
  Bottom 0.203: JP81.4 56.08,61.16 56.08,82.91 56.49,83.31 56.49,89.81 52.63,93.67 35.97,93.67 33.33,91.03 33.33,63.8 36.17,60.96 43.08,60.96 44.3,59.74 JP9.12
NEW_82  (via drill 0.3)
  Top 0.203: v58.52,7.11 58.32,7.32 58.32,55.88 54.05,60.15 JP81.3
  Bottom 0.203: v58.52,7.11 53.44,2.03 33.12,2.03 30.89,4.27 30.89,43.08 38.61,50.8 40.03,50.8 40.64,51.41 40.64,55.27 41.25,55.88 45.11,55.88 45.72,56.49 45.72,58.32 46.94,59.54 JP10.12
NEW_83  (via drill 0.3)
  Top 0.203: v32.31,2.03 54.25,2.03 59.13,6.91 59.13,56.49 54.05,61.57 JP81.2
  Route2 0.203: v34.95,54.25 36.78,56.08 37.39,56.08 38.2,56.9 38.2,57.51 39.22,58.52 39.83,58.52 40.84,59.54 40.84,60.15 41.86,61.16 43.28,61.16 44.3,62.18 JP9.11
  Bottom 0.203: v32.31,2.03 30.48,3.86 30.48,48.36 34.95,52.83 v34.95,54.25
NEW_84
  Top 0.203: JP10.11 45.72,60.96 36.17,60.96 35.36,60.15 34.54,60.15 32.72,61.98 32.72,93.67 35.97,96.93 48.77,96.93 57.71,87.99 57.71,66.65 54.05,62.99 JP81.1
NEW_85
  Route2 0.203: JP9.15 46.33,50.19 52.63,50.19 53.85,51.41 JP82.5
NEW_86
  Top 0.203: JP82.4 53.85,52.63 53.03,51.82 53.03,51.21 52.43,50.6 48.56,50.6 47.14,52.02 JP10.15
NEW_87
  Bottom 0.203: JP82.3 54.05,53.85 54.86,53.03 54.86,51 54.05,50.19 46.94,50.19 45.72,51.41 45.72,53.24 44.5,54.46 JP9.14
NEW_88
  Bottom 0.203: JP10.14 51,50.6 52.43,50.6 53.03,51.21 53.03,54.25 53.85,55.07 JP82.2
NEW_89
  Top 0.203: JP10.13 45.72,55.88 36.17,55.88 35.56,55.27 35.56,51.41 36.78,50.19 54.05,50.19 54.86,51 54.86,55.68 54.05,56.49 JP82.1
NEW_90
  Bottom 0.203: JP83.5 54.05,42.67 54.86,43.48 54.86,47.95 53.85,48.97 50.8,48.97 47.55,45.72 46.33,45.72 45.72,45.11 45.72,43.28 44.5,42.06 JP19.3
NEW_91
  Route15 0.203: JP19.2 45.52,45.52 45.52,47.14 47.35,48.97 52.43,48.97 53.24,48.16 53.24,44.5 53.85,43.89 JP83.4
NEW_92
  Bottom 0.203: JP83.3 53.85,45.11 53.03,45.92 53.03,47.95 52.43,48.56 51.21,48.56 47.14,44.5 JP20.2
NEW_93
  Route2 0.203: JP83.2 53.85,46.53 52.83,47.55 52.83,47.95 52.43,48.36 45.72,48.36 44.5,47.14 JP19.1
NEW_94
  Top 0.203: JP20.1 48.56,48.56 52.43,48.56 53.24,47.75 53.85,47.75 JP83.1
NEW_95
  Route2 0.203: JP19.5 43.28,38 41.66,38 40.44,39.22 40.44,47.14 42.47,49.17 54.05,49.17 55.27,47.95 55.27,39.42 54.86,39.01 54.86,37.19 54.05,36.37 JP84.5
NEW_96  (via drill 0.3)
  Top 0.203: v36.58,49.58 53.85,49.58 55.27,48.16 55.27,38.81 54.05,37.59 JP84.4 | v32.51,45.52 32.51,36.58 28.45,32.51 28.45,31.7 28.85,31.29 31.9,31.29 36.17,35.56 45.72,35.56 JP20.5
  Bottom 0.203: v32.51,45.52 v36.58,49.58
NEW_97
  Route2 0.203: JP84.3 54.86,39.62 54.86,47.75 53.85,48.77 44.7,48.77 43.08,47.14 43.08,44.09 42.06,43.08 41.45,43.08 40.84,42.47 40.84,41.45 41.86,40.44 43.28,40.44 44.3,39.42 JP19.4
NEW_98
  Top 0.203: JP20.4 45.72,40.64 36.17,40.64 35.56,41.25 35.56,47.55 36.98,48.97 53.85,48.97 54.86,47.95 54.86,40.84 54.05,40.03 JP84.2
NEW_99  (via drill 0.3 layers 15-16)
  Route15 0.203: v49.38,48.36 49.38,44.3 JP20.3
  Bottom 0.203: v49.38,48.36 50.39,49.38 54.05,49.38 55.27,48.16 55.27,42.67 54.05,41.45 JP84.1
NEW_100
  Route15 0.203: JP19.8 43.28,28.04 39.01,28.04 38.2,28.85 38.2,42.27 39.01,43.08 39.62,43.08 40.44,43.89 40.44,44.5 41.45,45.52 42.06,45.52 43.08,46.53 43.08,47.14 45.31,49.38 53.24,49.38 54.86,47.75 54.86,33.53 54.66,33.33 54.66,32.92 54.86,32.72 54.86,32.11 54.66,31.9 54.66,31.7 54.86,31.5 54.86,30.68 54.05,29.87 JP85.5
NEW_101
  Top 0.203: JP85.4 54.05,31.09 55.27,29.87 55.27,9.75 54.66,9.14 51.82,9.14 48.97,6.3 48.97,5.49 48.56,5.08 36.17,5.08 33.73,7.52 33.73,17.27 34.95,18.49 35.15,18.49 35.56,18.9 35.56,19.71 36.17,20.32 40.03,20.32 40.64,20.93 40.64,24.79 41.25,25.4 45.11,25.4 45.72,26.01 45.72,29.87 46.33,30.48 47.55,30.48 48.36,31.29 48.36,34.75 47.55,35.56 46.33,35.56 45.72,34.95 45.72,33.12 44.5,31.9 JP19.7
NEW_102
  Top 0.203: JP85.3 56.49,29.87 56.49,9.55 57.91,8.13 57.91,6.3 54.05,2.44 35.56,2.44 32.51,5.49 32.51,26.82 36.17,30.48 45.72,30.48 JP20.7
NEW_103  (via drill 0.3 layers 15-16)
  Route15 0.203: v51.21,43.28 51.21,47.95 51.61,48.36 52.43,48.36 52.83,47.95 52.83,41.25 53.44,40.64 53.24,40.44 53.24,35.76 53.44,35.56 53.24,35.36 53.24,34.34 53.85,33.73 JP85.2
  Bottom 0.203: v51.21,43.28 51.21,39.22 47.55,35.56 45.72,35.56 JP19.6
NEW_104
  Bottom 0.203: JP85.1 54.05,34.75 59.94,28.85 59.94,9.35 57.71,7.11 56.69,7.11 52.02,2.44 33.33,2.44 31.29,4.47 31.29,25.6 36.17,30.48 45.11,30.48 45.72,31.09 45.72,32.92 46.94,34.14 JP20.6
NEW_105
  Route15 0.203: JP19.10 43.28,22.96 39.22,22.96 38.2,21.95 38.2,16.26 37.39,15.44 36.78,15.44 35.76,14.43 35.76,13.41 36.37,12.8 36.98,12.8 38,11.79 38,11.18 40.44,8.74 46.33,8.74 48.36,6.71 52.83,6.71 56.08,9.96 56.08,17.48 54.86,18.69 54.86,19.91 54.66,20.12 54.66,20.32 54.86,20.52 54.86,21.13 54.66,21.34 54.66,21.74 54.86,21.95 54.86,22.55 54.05,23.37 JP86.5
NEW_106  (via drill 0.3)
  Route2 0.203: v51.21,10.16 51.41,9.96 52.43,9.96 52.83,10.36 52.83,23.57 53.85,24.59 JP86.4
  Bottom 0.203: v51.21,10.16 51.21,19.91 JP20.10
NEW_107
  Bottom 0.203: JP86.3 54.05,26.01 57.1,22.96 57.1,10.57 57.51,10.16 57.91,10.16 58.32,10.57 59.13,10.57 59.54,10.16 59.54,9.75 57.3,7.52 56.49,7.52 53.44,4.47 32.92,4.47 32.31,5.08 32.31,21.54 36.17,25.4 43.08,25.4 44.3,26.62 JP19.9
NEW_108  (via drill 0.3)
  Route2 0.203: v57.51,23.37 58.12,22.76 58.12,22.35 57.91,22.15 57.91,11.38 58.32,10.97 58.32,10.57 56.29,8.53 v55.47,8.53 | v35.36,16.87 35.36,17.48 34.34,18.49 34.34,29.26 35.76,30.68 35.76,32.31 36.37,32.92 37.19,32.92 38.2,31.9 38.2,31.29 39.22,30.28 39.83,30.28 40.84,29.26 40.84,28.65 41.66,27.84 42.27,27.84 43.28,26.82 43.28,26.21 43.89,25.6 45.92,25.6 JP20.9
  Bottom 0.203: JP86.2 57.51,23.77 v57.51,23.37 | v55.47,8.53 54.66,8.53 52.63,6.5 48.77,6.5 46.33,8.94 37.39,8.94 35.36,10.97 v35.36,16.87
NEW_109  (via drill 0.3, 0.3 layers 1-2)
  Top 0.203: v56.08,9.14 55.27,9.14 54.66,8.53 v52.02,8.53 | v49.58,10.97 49.58,15.24 49.17,15.65 v49.17,25.4
  Route2 0.203: v56.08,9.14 v57.71,10.77 | v49.58,10.97 v52.02,8.53
  Bottom 0.203: v57.71,10.77 58.12,11.18 58.12,24.38 54.05,28.45 JP86.1 | v49.17,25.4 49.17,27.03 JP20.8
NEW_110
  Route15 0.203: JP87.5 53.85,17.07 52.83,16.05 52.83,10.36 52.02,9.55 42.27,9.55 40.44,11.38 40.44,11.99 39.62,12.8 39.01,12.8 38.2,13.61 38.2,14.43 38.81,15.04 40.23,15.04 40.44,14.83 41.25,14.83 41.86,15.44 43.28,15.44 44.3,16.46 JP19.13
NEW_111  (via drill 0.3, 0.3 layers 15-16)
  Top 0.203: v40.64,15.44 40.64,19.71 41.25,20.32 43.08,20.32 44.3,19.1 JP19.12
  Route15 0.203: v49.99,7.32 52.83,7.32 55.68,10.16 55.68,17.27 54.66,18.29 54.05,18.29 JP87.4
  Bottom 0.203: v49.99,7.32 48.56,7.32 45.72,10.16 41.25,10.16 40.64,10.77 v40.64,15.44
NEW_112  (via drill 0.3)
  Top 0.203: v51.82,5.49 49.78,5.49 48.77,4.47 36.17,4.47 33.33,7.32 33.33,17.48 v34.95,19.1
  Bottom 0.203: v51.82,5.49 53.24,5.49 56.08,8.33 56.08,17.48 54.05,19.51 JP87.3 | v34.95,19.1 36.17,20.32 45.72,20.32 JP20.12
NEW_113  (via drill 0.3, 0.3 layers 15-16)
  Top 0.203: v54.66,9.96 54.86,10.16 54.86,20.12 54.05,20.93 JP87.2
  Route2 0.203: v48.56,14.02 47.14,15.44 41.45,15.44 40.44,16.46 40.44,17.07 39.62,17.88 39.01,17.88 38.2,18.69 38.2,19.51 39.22,20.52 43.28,20.52 44.3,21.54 JP19.11
  Route15 0.203: v54.66,9.96 53.65,9.96 52.22,8.53 v51,8.53
  Bottom 0.203: v51,8.53 51,8.94 48.77,11.18 48.77,13.82 v48.56,14.02
NEW_114  (via drill 0.3)
  Route2 0.203: v51.61,7.92 52.22,7.92 53.24,8.94 53.24,21.54 53.85,22.15 JP87.1
  Bottom 0.203: v51.61,7.92 51.61,8.94 50.39,10.16 50.39,18.29 47.14,21.54 JP20.11
NEW_115
  Route2 0.203: JP19.15 48.56,7.32 52.22,7.32 54.05,9.14 54.05,10.77 JP88.5
NEW_116
  Top 0.203: JP88.4 53.85,11.99 53.03,11.18 53.03,10.57 52.02,9.55 48.97,9.55 47.14,11.38 JP20.15
NEW_117
  Bottom 0.203: JP88.3 54.05,13.21 55.27,11.99 55.27,9.75 52.43,6.91 51.21,6.91 47.95,10.16 46.33,10.16 45.72,10.77 45.72,12.6 44.5,13.82 JP19.14
NEW_118
  Bottom 0.203: JP20.14 48.36,12.6 48.36,10.36 51.41,7.32 51.82,7.32 53.03,8.53 53.03,13.61 53.85,14.43 JP88.2
NEW_119  (via drill 0.3)
  Top 0.203: v41.45,9.55 41.45,9.96 40.64,10.77 40.64,14.63 41.25,15.24 45.72,15.24 JP20.13
  Route15 0.203: v41.45,9.55 41.86,9.14 52.22,9.14 53.24,10.16 53.24,15.24 53.85,15.85 JP88.1
NEW_120
  Top 0.203: JP41.5 11.58,83.11 16.05,83.11 16.46,82.7 JP1.3
NEW_121
  Top 0.203: JP41.4 11.58,84.53 16.05,84.53 16.46,84.94 JP1.2
NEW_122
  Top 0.203: JP41.3 11.58,85.75 15.24,85.75 15.85,86.36 17.48,86.36 18.9,84.94 JP2.2
NEW_123
  Top 0.203: JP1.1 16.05,87.17 11.58,87.17 JP41.2
NEW_124
  Route15 0.203: JP2.1 17.88,88.8 16.05,88.8 15.65,88.39 11.58,88.39 JP41.1
NEW_125
  Top 0.203: JP1.5 16.05,77.01 11.58,77.01 JP42.5
NEW_126
  Route15 0.203: JP2.5 17.88,78.64 16.05,78.64 15.65,78.23 11.58,78.23 JP42.4
NEW_127
  Top 0.203: JP42.3 11.58,79.45 16.05,79.45 16.46,79.86 JP1.4
NEW_128
  Top 0.203: JP42.2 11.58,80.67 15.24,80.67 15.85,81.28 17.68,81.28 18.9,80.06 JP2.4
NEW_129
  Route15 0.203: JP42.1 11.58,81.89 11.99,81.48 11.99,81.28 12.19,81.08 12.19,78.84 12.39,78.64 13.61,78.64 16.46,81.48 17.88,81.48 18.9,82.5 JP2.3
NEW_130
  Top 0.203: JP1.8 16.05,70.31 11.58,70.31 JP43.5
NEW_131
  Top 0.203: JP1.7 16.05,71.93 11.58,71.93 JP43.4
NEW_132  (via drill 0.3)
  Top 0.203: v15.44,73.36 15.24,73.15 11.58,73.15 JP43.3
  Bottom 0.203: v15.44,73.36 15.44,73.15 15.24,72.95 15.24,71.73 15.85,71.12 17.68,71.12 18.9,72.34 JP2.7
NEW_133
  Top 0.203: JP43.2 11.58,74.37 16.05,74.37 16.46,74.78 JP1.6
NEW_134
  Top 0.203: JP43.1 11.58,75.59 15.24,75.59 15.85,76.2 17.68,76.2 18.9,74.98 JP2.6
NEW_135
  Top 0.203: JP44.5 11.58,64.21 16.05,64.21 16.46,64.62 JP1.10
NEW_136
  Route2 0.203: JP2.10 17.88,63.6 16.05,63.6 15.85,63.8 13.01,63.8 11.58,65.23 JP44.4
NEW_137
  Top 0.203: JP44.3 11.58,66.85 13.82,66.85 14.22,67.26 16.46,67.26 JP1.9
NEW_138
  Route2 0.203: JP44.2 11.58,67.87 12.19,67.26 15.04,67.26 16.05,66.24 17.88,66.24 18.9,67.26 JP2.9
NEW_139  (via drill 0.3)
  Top 0.203: v13.21,70.92 15.65,70.92 15.85,71.12 17.68,71.12 18.9,69.9 JP2.8
  Bottom 0.203: v13.21,70.92 11.58,69.29 JP44.1
NEW_140
  Top 0.203: JP45.5 11.58,57.71 16.05,57.71 16.46,57.3 JP1.13
NEW_141
  Top 0.203: JP45.4 11.58,59.13 16.05,59.13 16.46,59.54 JP1.12
NEW_142
  Top 0.203: JP45.3 11.58,60.35 15.24,60.35 15.85,60.96 17.68,60.96 18.9,59.74 JP2.12
NEW_143
  Top 0.203: JP1.11 15.85,61.57 11.58,61.57 JP45.2
NEW_144
  Bottom 0.203: JP45.1 11.58,62.79 13.61,62.79 15.44,60.96 17.68,60.96 18.9,62.18 JP2.11
NEW_145
  Bottom 0.203: JP1.15 16.05,51.61 11.58,51.61 JP46.5
NEW_146
  Top 0.203: JP46.4 11.58,52.63 14.02,52.63 15.85,50.8 17.68,50.8 18.9,52.02 JP2.15
NEW_147
  Top 0.203: JP46.3 11.58,54.05 16.05,54.05 16.46,54.46 JP1.14
NEW_148
  Top 0.203: JP46.2 11.58,55.27 15.24,55.27 15.85,55.88 17.07,55.88 18.29,54.66 18.9,54.66 JP2.14
NEW_149
  Bottom 0.203: JP46.1 11.58,56.49 15.24,56.49 15.85,55.88 17.68,55.88 18.9,57.1 JP2.13
NEW_150
  Top 0.203: JP47.5 11.58,42.47 16.05,42.47 16.46,42.06 JP11.3
NEW_151
  Top 0.203: JP47.4 11.58,43.89 16.05,43.89 16.46,44.3 JP11.2
NEW_152
  Top 0.203: JP47.3 11.58,45.11 15.24,45.11 15.85,45.72 17.68,45.72 18.9,44.5 JP12.2
NEW_153
  Top 0.203: JP11.1 16.05,46.53 11.58,46.53 JP47.2
NEW_154
  Bottom 0.203: JP12.1 17.68,48.36 16.05,48.36 15.44,47.75 11.58,47.75 JP47.1
NEW_155
  Top 0.203: JP11.5 16.05,36.37 11.58,36.37 JP48.5
NEW_156
  Bottom 0.203: JP48.4 11.58,37.59 12.8,37.59 15.85,40.64 19.71,40.64 20.32,40.03 20.32,38.2 19.1,36.98 JP12.5
NEW_157
  Top 0.203: JP48.3 11.58,38.81 16.05,38.81 16.46,39.22 JP11.4
NEW_158
  Top 0.203: JP48.2 11.58,40.03 15.24,40.03 15.85,40.64 17.68,40.64 18.9,39.42 JP12.4
NEW_159
  Bottom 0.203: JP48.1 11.58,41.45 15.85,45.72 19.71,45.72 20.32,45.11 20.32,43.28 19.1,42.06 JP12.3
NEW_160
  Top 0.203: JP11.8 16.05,29.67 11.58,29.67 JP49.5
NEW_161
  Top 0.203: JP11.7 16.05,31.29 11.58,31.29 JP49.4
NEW_162
  Bottom 0.203: JP49.3 11.58,32.51 12.8,32.51 15.85,35.56 19.71,35.56 20.32,34.95 20.32,33.12 19.1,31.9 JP12.7
NEW_163
  Top 0.203: JP49.2 11.58,33.73 16.05,33.73 16.46,34.14 JP11.6
NEW_164
  Top 0.203: JP49.1 11.58,34.95 15.24,34.95 15.85,35.56 17.68,35.56 18.9,34.34 JP12.6
NEW_165
  Top 0.203: JP50.5 11.58,23.57 16.05,23.57 16.46,23.98 JP11.10
NEW_166
  Top 0.203: JP50.4 11.58,24.79 15.24,24.79 15.85,25.4 17.68,25.4 18.9,24.18 JP12.10
NEW_167
  Top 0.203: JP11.9 16.05,26.21 11.58,26.21 JP50.3
NEW_168
  Route2 0.203: JP50.2 11.58,27.23 13.01,25.81 15.85,25.81 16.05,25.6 17.88,25.6 18.9,26.62 JP12.9
NEW_169
  Bottom 0.203: JP50.1 11.58,28.65 14.02,28.65 15.85,30.48 17.68,30.48 18.9,29.26 JP12.8
NEW_170
  Top 0.203: JP51.5 11.58,17.07 16.05,17.07 16.46,16.66 JP11.13
NEW_171
  Top 0.203: JP51.4 11.58,18.49 16.05,18.49 16.46,18.9 JP11.12
NEW_172
  Top 0.203: JP51.3 11.58,19.71 15.24,19.71 15.85,20.32 17.68,20.32 18.9,19.1 JP12.12
NEW_173
  Top 0.203: JP11.11 16.05,21.13 11.58,21.13 JP51.2
NEW_174
  Bottom 0.203: JP51.1 11.58,22.35 12.8,22.35 15.85,25.4 19.71,25.4 20.32,24.79 20.32,22.96 19.1,21.74 JP12.11
NEW_175
  Top 0.203: JP11.15 16.05,10.97 11.58,10.97 JP52.5
NEW_176
  Route2 0.203: JP52.4 11.58,11.99 13.21,10.36 17.88,10.36 18.9,11.38 JP12.15
NEW_177
  Top 0.203: JP52.3 11.58,13.41 16.05,13.41 16.46,13.82 JP11.14
NEW_178
  Top 0.203: JP52.2 11.58,14.63 15.24,14.63 15.85,15.24 17.68,15.24 18.9,14.02 JP12.14
NEW_179
  Route2 0.203: JP12.13 17.88,17.68 16.05,17.68 15.85,17.48 13.01,17.48 11.58,16.05 JP52.1
NEW_180  (via drill 0.3 layers 15-16)
  Route15 0.203: v14.63,90.22 v11.79,90.22
  Bottom 0.203: v11.79,90.22 10.16,90.22 8.53,88.59 8.53,84.12 9.35,83.31 JP53.5 | v14.63,90.22 15.85,90.22 17.07,89 19.51,89 20.32,88.19 20.32,83.92 21.54,82.7 JP3.3
NEW_181  (via drill 0.3 layers 1-2)
  Top 0.203: v18.69,89.61 18.49,89.61 18.09,90.02 9.35,90.02 8.13,88.8 8.13,85.75 9.35,84.53 JP53.4
  Route2 0.203: v18.69,89.61 20.52,87.78 20.52,86.16 JP3.2
NEW_182
  Top 0.203: JP4.2 25.4,86.36 25.4,88.19 23.77,89.81 20.93,89.81 20.12,89 15.65,89 15.04,89.61 9.55,89.61 8.53,88.59 8.53,86.56 9.35,85.75 JP53.3
NEW_183
  Route2 0.203: JP53.2 9.55,87.17 10.57,88.19 10.57,88.59 12.19,90.22 19.1,90.22 21.54,87.78 JP3.1
NEW_184
  Route2 0.203: JP4.1 21.13,90.63 10.97,90.63 9.55,89.2 9.55,88.39 JP53.1
NEW_185  (via drill 0.3)
  Top 0.203: v21.13,89.2 20.32,88.39 20.32,86.97 19.71,86.36 v18.29,86.36
  Bottom 0.203: JP54.5 7.72,78.64 7.72,89.41 12.39,94.08 13.21,94.08 17.48,89.81 20.52,89.81 v21.13,89.2 | v18.29,86.36 15.85,86.36 15.24,85.75 15.24,81.89 15.85,81.28 19.71,81.28 20.32,80.67 20.32,78.84 21.54,77.62 JP3.5
NEW_186  (via drill 0.3)
  Top 0.203: v6.71,80.87 9.35,78.23 JP54.4
  Bottom 0.203: v6.71,80.87 6.71,91.24 11.38,95.91 30.28,95.91 31.29,94.89 31.29,80.26 27.23,76.2 25.4,76.2 JP4.5
NEW_187
  Top 0.203: JP54.3 9.35,79.45 6.5,82.3 6.5,89.61 12.8,95.91 27.23,95.91 30.28,92.86 30.28,81.69 29.87,81.28 22.96,81.28 21.74,80.06 JP3.4
NEW_188  (via drill 0.3 layers 15-16)
  Route15 0.203: v20.52,88.8 20.52,84.53 21.34,83.72 21.95,83.72 22.96,82.7 22.96,81.08 23.98,80.06 JP4.4
  Bottom 0.203: v20.52,88.8 19.91,89.41 17.27,89.41 13.01,93.67 12.6,93.67 8.13,89.2 8.13,81.89 9.35,80.67 JP54.2
NEW_189
  Route2 0.203: JP54.1 8.74,82.7 8.74,89.2 10.97,91.44 11.38,91.44 11.58,91.64 11.58,92.05 11.99,92.46 12.39,92.46 12.8,92.05 12.8,91.64 13.01,91.44 16.05,91.44 16.46,91.03 22.35,91.03 25.2,88.19 25.2,83.72 24.18,82.7 JP4.3
NEW_190
  Top 0.203: JP55.5 9.35,70.51 3.86,76 3.86,93.47 9.14,98.75 29.46,98.75 31.9,96.32 31.9,94.89 31.5,94.49 31.5,78.23 28.04,74.78 28.04,71.93 27.23,71.12 22.96,71.12 21.74,69.9 JP3.8
NEW_191
  Bottom 0.203: JP55.4 4.47,76.81 4.47,91.03 10.57,97.13 30.89,97.13 32.11,95.91 32.11,70.92 27.23,66.04 26.01,66.04 25.4,66.65 25.4,70.51 24.79,71.12 22.96,71.12 21.74,72.34 JP3.7
NEW_192
  Bottom 0.203: JP4.7 25.4,71.12 27.23,71.12 31.7,75.59 31.7,95.71 30.68,96.72 10.77,96.72 4.88,90.83 4.88,77.62 9.35,73.15 JP55.3
NEW_193
  Top 0.203: JP55.2 9.35,74.37 4.67,79.05 4.67,93.07 7.92,96.32 27.43,96.32 30.68,93.07 30.68,79.65 27.23,76.2 22.96,76.2 21.74,74.98 JP3.6
NEW_194
  Route15 0.203: JP55.1 9.35,75.59 9.35,76 8.74,76.61 8.74,88.59 9.75,89.61 18.69,89.61 20.12,88.19 20.12,79.86 21.34,78.64 21.95,78.64 22.96,77.62 22.96,76 23.98,74.98 JP4.6
NEW_195
  Top 0.203: JP56.5 9.35,64.01 8.53,63.2 8.53,51.21 9.75,49.99 23.98,49.99 25.4,51.41 25.4,60.35 24.79,60.96 20.93,60.96 20.32,61.57 20.32,63.4 21.54,64.62 JP3.10
NEW_196
  Route15 0.203: JP56.4 8.74,64.62 8.74,62.79 8.53,62.59 8.53,62.38 8.33,62.18 8.33,61.16 8.53,60.96 8.33,60.76 8.33,51 9.55,49.78 15.85,49.78 17.88,51.82 17.88,52.43 18.9,53.44 19.51,53.44 20.52,54.46 20.52,55.07 21.54,56.08 22.15,56.08 22.96,56.9 22.96,57.51 23.98,58.52 24.59,58.52 25.2,59.13 25.2,63.6 24.18,64.62 JP4.10
NEW_197
  Bottom 0.203: JP56.3 9.35,66.65 6.71,64.01 6.71,52.83 9.75,49.78 23.77,49.78 25.4,51.41 25.4,65.43 24.79,66.04 22.96,66.04 21.74,67.26 JP3.9
NEW_198  (via drill 0.3 layers 1-2)
  Top 0.203: v13.21,87.78 11.79,89.2 11.18,89.2 10.57,88.59 10.57,69.09 9.55,68.07 JP56.2
  Route2 0.203: v13.21,87.78 13.21,86.56 15.44,84.33 15.44,77.01 16.46,76 17.07,76 17.88,75.18 17.88,74.57 18.9,73.56 19.51,73.56 20.52,72.54 20.52,71.93 21.54,70.92 22.15,70.92 22.96,70.1 22.96,68.48 JP4.9
NEW_199  (via drill 0.3 layers 2-15)
  Route2 0.203: v13.61,89 16.46,86.16 17.07,86.16 17.88,85.34 17.88,77.01 18.9,76 19.51,76 20.52,74.98 20.52,74.37 21.34,73.56 21.95,73.56 22.96,72.54 22.96,70.92 23.98,69.9 JP4.8
  Route15 0.203: v13.61,89 10.97,89 10.57,88.59 10.57,70.31 9.55,69.29 JP56.1
NEW_200
  Route2 0.203: JP3.13 20.52,56.08 18.9,56.08 17.88,55.07 17.88,54.46 16.87,53.44 16.26,53.44 13.01,50.19 10.97,50.19 10.57,50.6 9.35,50.6 8.74,51.21 8.74,57.1 9.35,57.71 JP57.5
NEW_201
  Route15 0.203: JP57.4 9.55,58.93 10.36,58.12 10.36,57.3 10.16,57.1 10.16,56.9 10.36,56.69 10.36,56.08 10.16,55.88 10.16,55.68 10.36,55.47 10.36,54.86 10.16,54.66 10.16,54.46 10.36,54.25 10.36,53.65 10.16,53.44 10.16,53.24 10.57,52.83 10.57,51.21 11.18,50.6 11.79,50.6 15.44,54.25 15.44,55.07 16.46,56.08 17.07,56.08 17.88,56.9 17.88,57.51 18.9,58.52 20.52,58.52 21.54,59.54 JP3.12
NEW_202  (via drill 0.3)
  Route2 0.203: v15.04,62.18 16.46,60.76 22.96,60.76 23.98,59.74 JP4.12
  Bottom 0.203: JP57.3 10.57,61.37 10.57,88.59 11.18,89.2 11.79,89.2 13.82,87.17 13.82,63.4 v15.04,62.18
NEW_203
  Route2 0.203: JP57.2 9.35,61.57 9.35,61.16 8.33,60.15 8.33,51 9.14,50.19 10.36,50.19 10.77,49.78 15.85,49.78 17.88,51.82 17.88,52.43 18.9,53.44 19.51,53.44 20.52,54.46 20.52,55.07 21.54,56.08 22.15,56.08 22.96,56.9 22.96,57.51 23.98,58.52 24.59,58.52 25.2,59.13 25.2,60.15 24.18,61.16 22.76,61.16 21.74,62.18 JP3.11
NEW_204
  Route15 0.203: JP57.1 9.35,62.79 8.94,62.38 8.94,62.18 8.74,61.98 8.74,61.37 8.94,61.16 8.94,60.76 8.74,60.55 8.74,56.29 8.94,56.08 8.94,55.68 8.74,55.47 8.74,51.21 9.75,50.19 13.01,50.19 16.26,53.44 16.87,53.44 17.88,54.46 17.88,55.07 18.9,56.08 19.51,56.08 20.52,57.1 20.52,57.71 21.34,58.52 21.95,58.52 22.96,59.54 22.96,61.16 23.98,62.18 JP4.11
NEW_205  (via drill 0.3)
  Route2 0.203: v7.72,55.68 7.92,55.47 7.92,50.8 8.94,49.78 10.16,49.78 10.57,49.38 18.9,49.38 JP3.15
  Bottom 0.203: v7.72,55.68 7.11,55.07 7.11,53.03 8.53,51.61 9.35,51.61 JP58.5
NEW_206
  Bottom 0.203: JP58.4 9.55,52.63 10.57,51.61 10.57,51 11.38,50.19 22.76,50.19 23.98,51.41 23.98,52.02 JP4.15
NEW_207
  Top 0.203: JP58.3 9.55,53.85 10.57,52.83 10.57,51 11.18,50.39 19.3,50.39 20.32,51.41 20.32,53.24 21.54,54.46 JP3.14
NEW_208  (via drill 0.3 layers 1-2)
  Top 0.203: v17.88,55.88 22.76,55.88 23.98,54.66 JP4.14
  Route2 0.203: v17.88,55.88 16.26,55.88 15.44,55.07 15.44,54.25 11.79,50.6 11.18,50.6 10.57,51.21 10.57,54.05 9.55,55.07 JP58.2
NEW_209  (via drill 0.3 layers 15-16)
  Route15 0.203: v7.72,53.24 7.72,51 9.55,49.17 17.68,49.17 20.52,52.02 20.52,52.63 21.34,53.44 21.95,53.44 22.96,54.46 22.96,56.08 23.98,57.1 JP4.13
  Bottom 0.203: v7.72,53.24 7.72,54.86 9.35,56.49 JP58.1
NEW_210
  Route2 0.203: JP59.5 9.35,42.67 8.74,43.28 8.74,44.3 8.94,44.5 8.74,44.7 8.74,44.91 8.13,45.52 8.13,47.35 9.55,48.77 16.26,48.77 17.88,47.14 17.88,46.53 18.49,45.92 19.71,45.92 20.52,45.11 20.52,43.08 21.54,42.06 JP13.3
NEW_211
  Bottom 0.203: JP13.2 20.32,45.72 20.32,47.55 18.49,49.38 9.35,49.38 8.13,48.16 8.13,45.11 9.35,43.89 JP59.4
NEW_212
  Route15 0.203: JP59.3 10.57,46.13 10.57,47.95 10.97,48.36 11.79,48.36 15.44,44.7 15.44,43.89 16.26,43.08 16.87,43.08 17.88,42.06 17.88,41.45 18.9,40.44 19.51,40.44 20.52,39.42 20.52,38.81 21.13,38.2 21.95,38.2 22.96,39.22 22.96,39.83 23.98,40.84 24.59,40.84 25.2,41.45 25.2,43.28 24.18,44.3 JP14.2
NEW_213
  Top 0.203: JP59.2 8.53,47.35 8.53,47.95 9.55,48.97 19.71,48.97 21.54,47.14 JP13.1
NEW_214
  Top 0.203: JP59.1 9.55,47.75 10.36,47.75 11.18,48.56 19.3,48.56 20.32,47.55 20.32,46.33 20.93,45.72 22.76,45.72 23.98,46.94 JP14.1
NEW_215
  Route2 0.203: JP13.5 22.76,38 27.03,38 31.09,33.93 31.09,8.33 27.84,5.08 11.79,5.08 9.55,7.32 9.55,7.92 7.52,9.96 7.52,29.06 8.33,29.87 8.33,33.12 8.74,33.53 8.74,35.15 9.35,35.76 9.35,36.17 JP60.5
NEW_216  (via drill 0.3 layers 15-16)
  Route15 0.203: v10.36,16.46 10.36,10.77 11.18,9.96 11.79,9.96 15.44,13.61 15.44,27.23 16.26,28.04 16.87,28.04 17.88,29.06 17.88,29.67 18.9,30.68 19.51,30.68 20.52,31.7 20.52,32.31 21.34,33.12 21.95,33.12 22.96,34.14 22.96,35.76 23.98,36.78 JP14.5
  Bottom 0.203: v10.36,16.46 10.36,36.58 9.55,37.39 JP60.4
NEW_217
  Route15 0.203: JP13.4 20.52,40.44 20.52,42.06 19.51,43.08 18.9,43.08 17.88,44.09 17.88,44.7 17.07,45.52 16.46,45.52 13.21,48.77 9.55,48.77 8.13,47.35 8.13,45.52 8.74,44.91 8.74,42.27 8.94,42.06 8.94,41.86 8.74,41.66 8.74,41.05 8.94,40.84 8.94,40.64 8.74,40.44 8.74,39.62 8.94,39.42 8.94,39.22 9.35,38.81 JP60.3
NEW_218  (via drill 0.3 layers 15-16)
  Route15 0.203: v15.24,48.36 16.66,48.36 17.88,47.14 17.88,46.53 18.9,45.52 24.59,45.52 25.6,44.5 25.6,40.84 JP14.4
  Bottom 0.203: JP60.2 10.57,41.05 10.57,47.95 11.18,48.56 15.04,48.56 v15.24,48.36
NEW_219
  Route2 0.203: JP60.1 9.55,41.45 10.36,42.27 10.36,42.88 10.16,43.08 10.16,43.28 10.36,43.48 10.36,44.3 10.16,44.5 10.16,44.7 10.36,44.91 10.36,45.52 10.16,45.72 10.16,45.92 10.36,46.13 10.36,46.74 10.16,46.94 10.16,47.14 10.57,47.55 10.57,47.95 10.97,48.36 13.61,48.36 16.46,45.52 19.51,45.52 20.12,44.91 20.12,41.86 21.13,40.84 22.96,40.84 23.98,41.86 JP14.3
NEW_220  (via drill 0.3 layers 1-2)
  Top 0.203: v11.79,8.94 22.35,8.94 23.57,10.16 24.79,10.16 25.4,10.77 25.4,19.71 24.79,20.32 20.93,20.32 20.32,20.93 20.32,27.84 21.54,29.06 JP13.8
  Route2 0.203: JP61.5 8.74,29.06 8.74,18.29 8.33,17.88 8.33,10.36 9.75,8.94 v11.79,8.94
NEW_221
  Route15 0.203: JP61.4 9.35,31.09 9.35,30.68 7.92,29.26 7.92,14.83 6.5,13.41 6.5,8.53 10.57,4.47 12.8,4.47 13.41,3.86 14.22,3.86 15.44,2.64 26.82,2.64 29.67,5.49 29.67,22.35 27.84,24.18 27.84,27.03 26.82,28.04 26.21,28.04 25.2,29.06 25.2,29.67 24.18,30.68 22.76,30.68 21.74,31.7 JP13.7
NEW_222  (via drill 0.3 layers 15-16)
  Route15 0.203: v17.27,7.32 20.32,10.36 22.15,10.36 22.96,11.18 22.96,11.79 23.98,12.8 24.59,12.8 25.2,13.41 25.2,14.43 24.18,15.44 23.57,15.44 22.76,16.26 22.76,16.87 21.74,17.88 21.13,17.88 20.52,18.49 v20.52,25.4
  Bottom 0.203: v17.27,7.32 15.65,7.32 15.24,6.91 10.97,6.91 8.53,9.35 8.53,31.5 9.35,32.31 JP61.3 | v20.52,25.4 20.52,25.81 20.32,26.01 20.32,29.87 20.93,30.48 22.76,30.48 23.98,31.7 JP14.7
NEW_223
  Route2 0.203: JP61.2 9.35,33.53 8.74,32.92 8.74,31.9 8.94,31.7 8.74,31.5 8.74,30.68 8.94,30.48 8.94,30.28 8.74,30.07 8.74,29.67 8.33,29.26 8.33,18.49 7.92,18.09 7.92,10.16 9.75,8.33 12.8,8.33 15.65,5.49 27.64,5.49 30.68,8.53 30.68,32.51 27.43,35.76 23.16,35.76 21.74,34.34 JP13.6
NEW_224  (via drill 0.3)
  Top 0.203: JP61.1 1.83,27.23 1.83,7.72 9.14,0.41 28.45,0.41 v28.65,0.61 | v29.46,26.82 29.46,30.07 28.04,31.5 28.04,34.75 27.23,35.56 25.4,35.56 JP14.6
  Bottom 0.203: v28.65,0.61 28.65,4.27 29.46,5.08 v29.46,26.82
NEW_225  (via drill 0.3)
  Top 0.203: v27.84,22.76 30.28,20.32 30.28,6.91 28.04,4.67 10.57,4.67 6.1,9.14 6.1,20.12 9.35,23.37 JP62.5
  Bottom 0.203: v27.84,22.76 27.84,23.37 28.04,23.57 28.04,24.59 27.23,25.4 22.96,25.4 21.74,24.18 JP13.10
NEW_226  (via drill 0.3, 0.3 layers 15-16)
  Top 0.203: v5.28,23.37 6.1,23.37 7.32,24.59 9.35,24.59 JP62.4
  Route15 0.203: v9.35,7.72 11.38,7.72 v12.19,8.53
  Bottom 0.203: v5.28,23.37 5.28,24.18 5.69,24.59 6.1,24.59 8.13,22.55 8.13,8.94 v9.35,7.72 | v12.19,8.53 15.24,11.58 15.24,14.63 15.85,15.24 19.71,15.24 20.32,15.85 20.32,19.71 20.93,20.32 24.79,20.32 25.4,20.93 25.4,22.76 24.18,23.98 JP14.10
NEW_227
  Route15 0.203: JP62.3 9.35,26.01 9.35,25.6 8.33,24.59 8.33,14.63 6.91,13.21 6.91,8.74 10.77,4.88 13.01,4.88 13.61,4.27 14.43,4.27 15.65,3.05 26.62,3.05 29.26,5.69 29.26,20.52 26.82,22.96 26.21,22.96 25.2,23.98 25.2,24.59 24.18,25.6 22.76,25.6 21.74,26.62 JP13.9
NEW_228  (via drill 0.3)
  Top 0.203: v5.89,23.98 6.1,23.98 9.35,27.23 JP62.2 | v12.39,3.45 15.44,3.45 15.85,3.05 29.06,3.05 31.5,5.49 31.5,21.13 27.23,25.4 25.4,25.4 JP14.9
  Bottom 0.203: v5.89,23.98 5.89,9.96 v12.39,3.45
NEW_229
  Top 0.203: JP14.8 25.4,30.48 27.23,30.48 28.04,29.67 28.04,27.43 32.11,23.37 32.11,4.67 30.07,2.64 8.94,2.64 4.06,7.52 4.06,23.16 9.35,28.45 JP62.1
NEW_230